# Altium PCB SMU_V2.01.PcbDoc (part 2 of 2)
Units mil, origin at the board's own origin, x right, y up, seen from the top; angles counter-clockwise.
Board outline 8661.42 x 7437.01 mil, 4 copper layers (Component Side, Ground Plane, Power Plane, Solder Side), stack 33.234 mil thick; 219 components, 151 nets, 743 pads, 760 vias.
Unrouted connection lines stored in the file: 6.
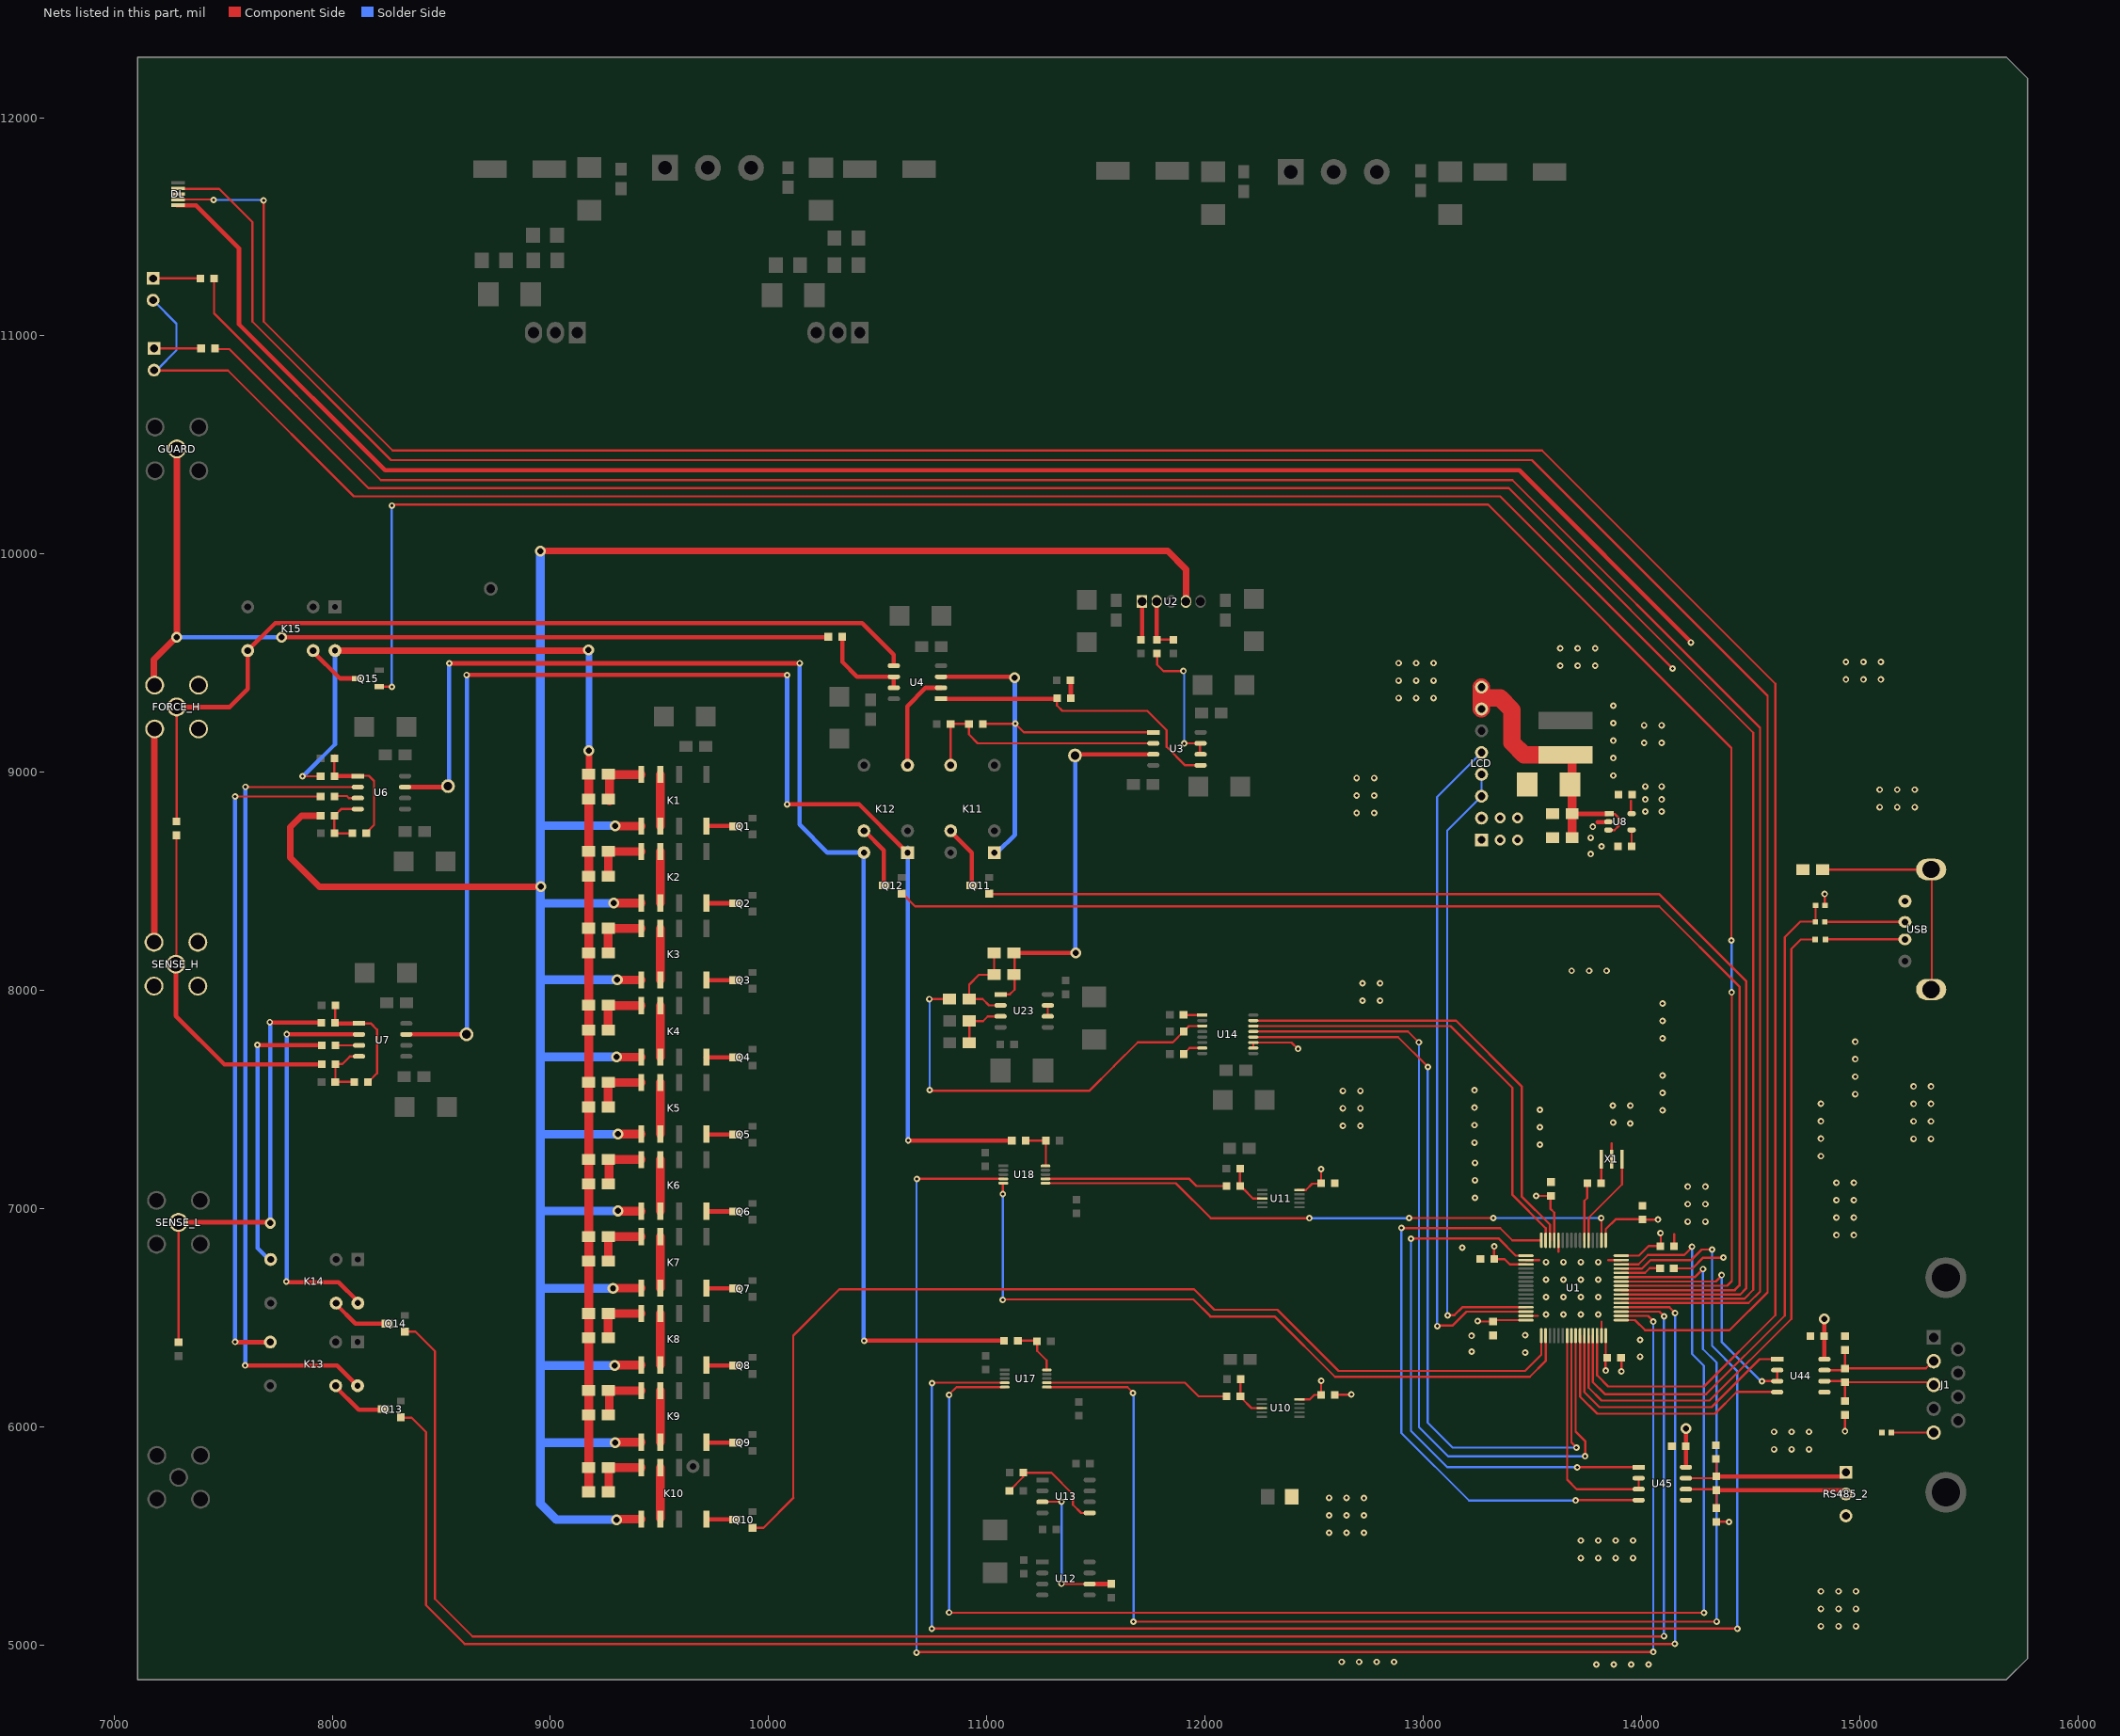
[diagram p4: the nets of this part, all layers, seen from the top]

## Via types
v1: diameter 30/30 (per signal layer), hole 14, Component Side to Solder Side, 647 vias
v2: diameter 50, hole 28, Component Side to Solder Side, 66 vias
v3: diameter 30, hole 14, Component Side to Solder Side, 43 vias
v4: diameter 39.37, hole 29.53, Component Side to Solder Side, 2 vias
v5: diameter 66.93, hole 47.24, Component Side to Solder Side, 2 vias

## Nets (pads, with @x,y where several pads share a name; then routed paths per layer and width w, separated by ;. In a path a pad name is that pad's centre, name@x,y a point inside that pad or via, vN(x,y) a via of type N, cw(c..) or ccw(c..) an arc to the next point about the centre after c; other vN are vias at no path point) (continued)
CTRL10: Q10.1 U1.33 | length 4798.6
  Component Side w10: Q10.1@9920.57,5537.65 9976.4,5537.65 10113.13,5674.38 ; Q10.1@9922.12,5537.11 Q10.1@9922.12,5551.99 ; 10112.55,5673.29 10112.55,6418.58 10324.16,6630.2 11949.24,6630.2 12042.84,6536.6 12331.73,6536.6 12612.01,6256.32 13466.42,6256.32 13540.97,6330.87 U1.33@13540.97,6418.24
CTRL11: Q11.1 U1.55 | length 5625.4
  Component Side w10: Q11.1@11014.47,8436.12 11020.61,8442.25 14080.45,8442.25 14478.93,8043.78 14478.93,8042.97 14479.29,8042.61 14479.29,6633.68 14452.82,6607.22 U1.55@13907.11,6607.22
CTRL12: Q12.1 U1.56 | length 5930.3
  Component Side w10: Q12.1@10614.72,8442.38 10671.36,8385.73 14080.95,8385.74 14449,8017.69 14449,6648.43 14427.48,6626.9 U1.56@13907.11,6626.9
CTRL13: Q13.1 U1.52 | length 8504
  Component Side w10: Q13.1@8316.05,6042.29 8363.72,6042.29 8429.56,5976.45 8429.56,5182.38 8606.5,5005.45 v3@14152.06,5005.45 ; U1.52@13907.11,6548.16 14128.51,6548.16 v3@14154.38,6522.29
  Solder Side w10: v3@14154.38,5005.85 v3@14154.38,6521.19
  other v3: 14152.57,5005.85 14154.13,6521.21
CTRL14: Q14.1 U1.51 | length 8689.2
  Component Side w10: Q14.1@8326.42,6436.35 8381.6,6436.35 8470.69,6347.26 8470.69,5212.23 8643.37,5039.55 v3@14103.85,5039.55 ; U1.51@13907.11,6528.48 14082.3,6528.48 v3@14101.1,6509.67
  Solder Side w10: v3@14103.13,5039.82 v3(14103.13,6506.32)
  other v3: 14102.67,5041.07
CTRL15: Q15.1 U1.57 | length 10461.4
  Component Side w10: Q15.1@8214.96,9392.83 v3@8277.84,9392.83 ; v3@8272.01,10226.66 13297.33,10226.66 14412.19,9111.8 v1@14412.19,8228.18 ; U1.57@13907.11,6646.59 14392.55,6646.59 14413.69,6667.73 v1@14413.69,7988.82
  Solder Side w10: v3(8272.93,9391.66) v3@8272.93,10227.29 ; v1(14413.05,7991.51) v1@14413.05,8232.41
  other v1: 14412.19,8229.76
  other v3: 8273.17,10222.14
D1: K1.8 Q1.3 | length 133.6
  Component Side w20: K1.8@9715.55,8753.74 Q1.3@9849.19,8753.74
D2: K2.8 Q2.3 | length 130.3
  Component Side w20: K2.8@9715.03,8399.71 Q2.3@9845.34,8399.71
D3: K3.8 Q3.3 | length 130.4
  Component Side w20: K3.8@9714.93,8046.63 Q3.3@9845.34,8046.63
D3V3: C1.2 C2.2 C3.2 C4.2 C5.2 C6.2 C22.2 C29.2 C81.2 C85.2 C108.2 LED0.2 LED1.2 R42.1 R102.2 R105.2 U1.1 U1.13 U1.19 U1.32 U1.48 U1.64 U8.5 U10.10 U11.10 U14.10 U14.11 U44.8 U45.8 | length 10578.4
  Component Side w10: LED1.2@7182.43,10841.68 7522.4,10841.68 8099.34,10264.74 13352.45,10264.74 v1(14141.88,9475.31) ; U14.10@12221.05,7736.31 U14.11@12221.05,7758.94 ; U14.11@12226.3,7761.51 12395.95,7761.51 12424.84,7732.62 v1@12426.19,7732.62 ; U11.10@12421.52,7085.54 12461.73,7085.54 12490.94,7114.75 C85.2@12523.99,7114.75 ; U10.10@12432.09,6125.59 12479.89,6125.59 12500.92,6146.61 C81.2@12515.07,6146.61 ; C85.2@12531.5,7116.98 v1@12531.5,7175.83 ; C81.2@12531.71,6147.25 v1@12531.71,6210.47 ; v1@13245.25,6482.49 C6.2@13319.59,6482.49 ; C2.2@13312.76,6768.97 13372.99,6768.97 13396.94,6745.01 U1.19@13470.11,6745.01 ; C6.2@13319.59,6489.11 U1.32@13470.11,6489.11 ; C2.2@13324.77,6770.14 v1@13324.77,6828.08 ; v1(13516.67,7058.4) C1.2@13582.31,7058.4 ; C1.2@13584.91,7058.4 C1.2@13582.31,7058.4 ; U1.13@13600.03,6855.25 13600.03,6982.34 13582.31,7000.06 C1.2@13582.31,7058.4 ; v1(13835.74,6258.05) C5.2@13835.74,6314.15 ; C5.2@13836.25,6305.29 U1.48@13836.25,6418.24 ; U1.1@13836.25,6855.25 13836.25,6906.38 13881.15,6951.29 C4.2@14009.16,6951.29 ; U1.64@13907.11,6784.38 13987.94,6784.38 14032.89,6829.34 C3.2@14084.69,6829.34 ; U8.5@13950.9,8809.48 13950.9,8869.84 ; C4.2@14003.81,6950.29 v1@14078.83,6950.29 ; C3.2@14088.76,6836.88 v1@14088.76,6883.52 ; R105.2@14342.63,5565.07 v1@14398.65,5565.07 ; v2(14838.42,6495.31) v2@14838.42,6508.77 ; R42.1@14839.75,8391.23 v1(14839.75,8442.22) ; v1(14932.63,5979.56) R102.2@14932.63,6055.07
  Component Side w20: U45.8@14203.42,5815.31 v2(14203.42,5991.84) ; U44.8@14838.42,6310.31 v2(14838.42,6495.31)
  Solder Side w10: LED0.2@7178.74,11163.53 7285.73,11056.54 7285.63,11056.44 7285.63,10933.88 7194.78,10843.04 LED1.2@7183.34,10843.04
  other v1: 14401.39,5564.22 12532.32,6210.98 13248.99,6485.31 13325.59,6826.87 14087.17,6887.98 14075.08,6949.95 12531.7,7180.98 12426.15,7732.55 14016.88,8820.31 14091.88,8820.31 14016.88,8875.31 14091.88,8875.31 14016.88,8935.31 14091.88,8935.31
D4: K4.8 Q4.3 | length 133.8
  Component Side w20: K4.8@9711.55,7693.54 Q4.3@9845.34,7693.54
D5: K5.8 Q5.3 | length 132.6
  Component Side w20: K5.8@9712.77,7340.46 Q5.3@9845.34,7340.46
D5V0: C57.2 C58.2 C59.1 L2.2 LCD.7 LCD.8 U8.1 U8.3 | length 1367.8
  Component Side w10: U8.3@13844.6,8734.68 13876.25,8734.68 13896.88,8755.31 13896.88,8790.31 13877.71,8809.48 U8.1@13844.6,8809.48
  Component Side w22: C58.2@13682.71,8809.48 U8.1@13844.6,8809.48
  Component Side w40: C57.2@13682.34,8700.76 13682.34,8935.31 L2.2@13682.34,9070.07
  Component Side w80: LCD.7@13266.88,9290.31 LCD.8@13266.88,9390.31 ; 13266.88,9340.31 13351.88,9340.31 13406.88,9285.31 13406.88,9135.31 13461.88,9080.31 L2.2@13651.88,9080.31
D6: K6.8 Q6.3 | length 126.8
  Component Side w20: K6.8@9718.57,6987.37 Q6.3@9845.34,6987.37
D7: K7.8 Q7.3 | length 128.9
  Component Side w20: K7.8@9716.44,6634.29 Q7.3@9845.34,6634.29
D8: K8.8 Q8.3 | length 127
  Component Side w20: K8.8@9718.38,6281.21 Q8.3@9845.34,6281.21
D9: K9.8 Q9.3 | length 132
  Component Side w20: K9.8@9713.35,5928.12 Q9.3@9845.34,5928.12
D10: K10.8 Q10.3 | length 128
  Component Side w20: K10.8@9715.55,5576.99 Q10.3@9843.53,5576.99
D11: K11.5 Q11.3 | length 272.2
  Component Side w10: K11.5@10834.46,8728.35 K11.5@10834.46,8732.05
  Component Side w20: K11.5@10834.46,8728.35 10930.62,8632.19 Q11.3@10930.62,8499.67
D12: K12.5 Q12.3 | length 284.1
  Component Side w10: K12.5@10436.55,8732.05 K12.5@10438.01,8732.05
  Component Side w20: K12.5@10438.01,8732.05 10528.04,8642.01 Q12.3@10528.04,8486.75
D13: K13.5 Q13.3 | length 267.4
  Component Side w10: K13.5@8014.82,6185.08 K13.5@8014.82,6187.86
  Component Side w20: K13.5@8014.82,6185.08 8120.68,6079.23 Q13.3@8235.57,6079.23
D14: K14.5 Q14.3 | length 284.6
  Component Side w20: K14.5@8016.68,6562.69 8106.59,6472.77 Q14.3@8264.05,6472.77
D15: K15.5 Q15.3 | length 253.5
  Component Side w20: K15.5@7910.7,9554.75 8035.22,9430.23 Q15.3@8112.6,9430.23
DAC1_FSYNC: U1.41 U14.13 | length 3927.6
  Component Side w10: U14.13@12222.43,7811.9 12929.54,7811.9 v1@12979.23,7762.21 ; U1.41@13698.45,6418.24 13698.45,5978.74 13741.88,5935.31 v1(13741.88,5865.31)
  Solder Side w10: v1@12980.14,7761.37 12980.14,5999.26 13114.08,5865.31 v1(13741.88,5865.31)
  other v1: 12979.57,7762.59
DAC1_RESET: U1.14 U14.15 | length 2110.4
  Component Side w10: U14.15@12224.6,7862.29 13149.46,7862.29 13450.72,7561.03 13450.72,7056.85 13580.34,6927.22 U1.14@13580.34,6855.25
DAC1_SCLK: U1.40 U14.12 | length 3735.5
  Component Side w10: U14.12@12224.06,7786.7 12884.54,7786.7 v1@13020.01,7651.24 ; U1.40@13678.77,6418.24 13678.77,5928.43 v1(13701.88,5905.31)
  Solder Side w10: v1@13020.04,7651.46 13020.04,6019.85 13134.58,5905.31 v1(13701.88,5905.31)
  other v1: 13020.67,7649.88
DAC1_SDATA: U1.15 U14.14 | length 2059.5
  Component Side w10: U14.14@12225.14,7837.1 13125.18,7837.1 ; 13127.08,7835.11 13408.8,7553.4 13408.8,7062.49 13560.66,6910.63 U1.15@13560.66,6855.25
DGND: C1.1 C2.1 C3.1 C4.1 C5.1 C6.1 C22.1 C23.1 C29.1 C57.1 C58.1 C59.2 C81.1 C85.1 C108.1 DL.5 L1.2 L3.2 LCD.1 LCD.2 R2.2 R66.1 R101.2 R104.2 RS485_2.3 U1.12 U1.18 U1.31 U1.47 U1.63 U8.2 U44.5 U45.5 USB.4 X1.2 | length 8807.1
  Component Side w10: C81.1@12594.7,6147.25 v1@12672.07,6147.25 ; U1.31@13470.11,6508.79 13525.37,6508.79 ; U1.18@13470.11,6764.7 13531.27,6764.7 ; 13619.71,6802.48 U1.12@13619.71,6855.25 ; U1.47@13816.56,6418.24 13816.56,6481.79 ; 13847.49,6764.7 U1.63@13907.11,6764.7 ; X1.2@13863.21,7227.14 13863.21,7299.16 ; v1(13907.96,6253.87) C5.1@13907.96,6317.13 ; C3.1@14149.66,6828.63 14149.66,6882.15 ; 14166.08,6726.9 14233.71,6726.9 14282.33,6775.51 v1@14373.8,6775.51 ; v1(14226.55,9594.76) v1@14226.55,9597.59
  Component Side w20: DL.5@7287.73,11598.8 7376.27,11598.8 7572.49,11402.58 7572.49,11053.99 8242.44,10384.03 13440.1,10384.03 v1@14226.55,9597.59 ; 13798.66,8772.08 U8.2@13844.6,8772.08
  other v1: 13792.56,4911.52 13872.56,4911.52 13952.56,4911.52 14032.56,4911.52 12625.86,4923 12705.86,4923 12785.86,4923 12865.86,4923 14822.53,5086.38 14902.53,5086.38 14982.53,5086.38 14822.53,5166.38 14902.53,5166.38 14982.53,5166.38 14822.53,5246.38 14902.53,5246.38 14982.53,5246.38 13721.63,5399.14 13801.63,5399.14 13881.63,5399.14 13961.63,5399.14 13721.63,5479.14 13801.63,5479.14 13881.63,5479.14 13961.63,5479.14 12568.37,5515.09 12648.37,5515.09 12728.37,5515.09 12568.37,5595.09 12648.37,5595.09 12728.37,5595.09 12728.25,5673.54 12568.37,5675.09 12648.37,5675.09 14607.34,5897.3 14687.34,5897.3 14767.34,5897.3 14607.34,5977.3 14687.34,5977.3 14767.34,5977.3 12670.6,6148.64 13993.99,6322.01 13466.88,6340.31 13221.75,6344.34 13993.99,6398.36 13220.96,6417.42 13466.88,6420.31 13561.88,6515.31 13641.88,6515.31 13721.88,6515.31 13801.88,6515.31 13561.88,6595.31 13641.88,6595.31 13721.88,6595.31 13801.88,6595.31 13561.88,6675.31 13641.88,6675.31 13721.88,6675.31 13801.88,6675.31 13561.88,6755.31 13641.88,6755.31 13721.88,6755.31 13801.88,6755.31 14374.93,6776.65 13178.69,6821.71 14893.33,6879.01 14973.33,6879.01 14212.33,6940.74 14292.33,6940.74 14893.33,6959.01 14973.33,6959.01 14212.33,7020.74 14292.33,7020.74 14893.33,7039.01 14973.33,7039.01 13236.88,7050.31 14212.33,7100.74 14292.33,7100.74 14893.33,7119.01 14973.33,7119.01 13236.88,7130.31 13236.88,7210.31 14822.19,7240.68 13534.13,7293.67 13234.52,7303.01 15246.88,7320.31 15326.88,7320.31 14822.19,7320.68 13534.13,7373.67 12631.88,7380.31 12711.88,7380.31 13234.52,7383.01 13948.13,7390.96 13869.84,7395.33 15246.88,7400.31 15326.88,7400.31 14822.19,7400.68 14096.2,7450.86 13534.13,7453.67 12631.88,7460.31 12711.88,7460.31 13234.52,7463.01 13868.91,7472.63 13948.91,7472.63 15246.88,7480.31 15326.88,7480.31 14822.19,7480.68 14979.77,7525.18 14096.2,7530.86 12631.88,7540.31 12711.88,7540.31 13234.52,7543.01 15246.88,7560.31 15326.88,7560.31 14979.77,7605.18 14096.2,7610.86 14979.77,7685.18 14979.77,7765.18 14096.2,7780.86 14096.2,7860.86 14096.2,7940.86 12721.88,7953.43 12801.88,7953.43 12721.88,8033.43 12801.88,8033.43 13679.84,8090.23 13759.84,8090.23 13839.84,8090.23 13766.88,8625.31 13816.88,8660.31 13766.88,8700.31 13776.88,8750.31 12694.62,8813.79 12774.62,8813.79 15091.88,8840.31 15171.88,8840.31 15251.88,8840.31 12694.62,8893.79 12774.62,8893.79 15091.88,8920.31 15171.88,8920.31 15251.88,8920.31 12694.62,8973.79 12774.62,8973.79 13870.46,8985.13 13870.46,9065.13 14011.88,9135.31 14091.88,9135.31 13870.46,9145.13 14011.88,9215.31 14091.88,9215.31 13870.46,9225.13 13870.46,9305.13 12886.88,9340.31 12966.88,9340.31 13046.88,9340.31 12886.88,9420.31 12966.88,9420.31 13046.88,9420.31 14936.88,9425.31 15016.88,9425.31 15096.88,9425.31 13627.78,9488.72 13707.78,9488.72 13787.78,9488.72 12886.88,9500.31 12966.88,9500.31 13046.88,9500.31 14936.88,9505.31 15016.88,9505.31 15096.88,9505.31 13627.78,9568.72 13707.78,9568.72 13787.78,9568.72
  other v2: 13351.88,8690.31 13431.88,8690.31 13351.88,8790.31 13431.88,8790.31
DUT_VOLTAGE: K12.1 R51.2 T2.1 U7.7 | length 6406.4
  Component Side w20: U7.7@8339.58,7798.88 T2.1@8615.03,7798.88 ; v3(8615.67,9446.19) v3@10079.09,9446.19 ; v3(10084.09,8853.31) 10414.46,8853.31 K12.1@10611.71,8656.06 ; v3@10638.09,7311.69 R51.2@11114.15,7311.69
  Solder Side w20: T2.1@8616.66,7799.23 v3@8616.66,9446.22 ; v3@10084.41,8856.18 v3(10084.41,9445.92) ; v3@10637.68,7308.76 K12.1@10637.68,8654.16
  other v3: 10639.81,7313.24
FB_R_T1: C70.1 C71.1 C72.1 C73.1 C74.1 C75.1 C76.1 C77.1 C78.1 C79.1 K15.6 R19.2 R31.1 R32.1 R33.1 R34.1 R35.1 R36.1 R37.1 R38.1 R39.1 R40.1 | length 5739.7
  Component Side w10: v3@7867.94,8981.55 R19.2@7948.53,8981.55
  Component Side w30: K15.6@8012.65,9557.88 v2@9173.85,9557.88 ; R31.1@9171.24,8985.77 9176.58,8991.11 v2(9176.56,9099.22)
  Component Side w40: C79.1@9175.42,5705.38 R40.1@9175.42,5813.12 C78.1@9175.42,6055.22 R39.1@9175.42,6166.28 C77.1@9175.42,6407.94 R38.1@9175.42,6519.44 C76.1@9175.42,6760.67 R37.1@9175.42,6872.6 C75.1@9175.42,7113.4 R36.1@9175.42,7225.76 C74.1@9175.42,7466.13 R35.1@9175.42,7578.92 C73.1@9175.42,7818.86 R34.1@9175.42,7932.09 C72.1@9175.42,8171.58 R33.1@9175.42,8285.25 C71.1@9175.42,8524.31 R32.1@9175.42,8638.41 C70.1@9175.42,8877.04 R31.1@9175.42,8991.57
  Solder Side w20: v3@7866.28,8982.22 8012.65,9128.59 K15.6@8012.65,9557.88
  Solder Side w30: v2@9175.92,9558.76 9176.56,9558.12 v2(9176.56,9099.22)
  other v2: 9174.48,9560.15
  other v3: 7864.07,8981.28
FB_R_T2: K1.5 K2.5 K3.5 K4.5 K5.5 K6.5 K7.5 K8.5 K9.5 K10.5 R21.2 U2.4 | length 13617.1
  Component Side w30: R21.2@7939.8,8801.07 7860.21,8801.07 7808.19,8749.06 7808.19,8607.99 7941.02,8475.16 v2@8953.23,8475.16 ; v2@8955.66,10013.74 11828.42,10013.74 11911.99,9930.18 U2.4@11911.99,9782.7
  Component Side w40: v2@9287.6,6635.91 K7.5@9416.34,6635.91 ; v2@9288.99,8400.76 K2.5@9416.34,8400.76 ; v2@9289.28,6282.93 K8.5@9416.34,6282.93 ; v2@9296.82,5929.96 K9.5@9416.34,5929.96 ; v2@9297.25,7694.82 K4.5@9416.34,7694.82 ; v2@9298.95,8753.74 K1.5@9416.34,8753.74 ; v2@9304.27,5576.99 K10.5@9416.34,5576.99 ; v2@9307.92,8047.79 K3.5@9416.34,8047.79 ; v2@9309.83,6988.88 K6.5@9416.34,6988.88 ; v2@9314.01,7341.85 K5.5@9416.34,7341.85
  Solder Side w40: v2@8953.9,10014.45 8953.9,6989.61 ; 8954.79,8755.61 v2@9300.6,8755.61 ; 8956.15,6281.23 v2(9293.52,6281.23) ; 8957.46,6634.94 v2(9286.79,6634.94) ; 8960.46,7695.1 v2(9303.13,7695.1) ; 8960.49,8399.92 v2(9289.6,8399.92) ; 8962.72,8049.77 v2(9306.02,8049.77) ; 8963.99,7341.39 v2(9308.9,7341.39) ; v2(9296.41,5927.52) 8953.9,5927.52 ; v2(9303.13,5574.77) 9027.3,5574.77 8953.9,5648.16 8953.9,5927.52 ; v2(9308.9,6989.61) 8953.9,6989.61 ; 8953.9,5927.52 8953.9,6989.61
  other v2: 8956.65,8475.63 9296.1,8754.49 8953.63,10013.91
FH_OUT: FORCE_H.1 K15.4 R76.1 U4.5 | length 4177.8
  Component Side w10: R76.1@7286.86,8778.52 FORCE_H.1@7286.86,9298.99 ; K15.4@7612.65,9557.88 K15.4@7612.9,9558.12
  Component Side w20: FORCE_H.1@7286.86,9298.99 7530.07,9298.99 7612.9,9381.82 7612.9,9558.12 7738.67,9683.9 10427.91,9683.9 10572.74,9539.06 U4.5@10572.74,9490.63
GUARD: FORCE_H.2 GUARD.1 R28.2 SENSE_H.2 | length 5137.4
  Component Side w10: SENSE_H.2@7175.5,8220.98 SENSE_H.2@7184.03,8220.98 ; SENSE_H.2@7383.96,8011.56 SENSE_H.2@7383.96,8020.19
  Component Side w20: v2@7762.69,9619.66 R28.2@10273.67,9619.66
  Component Side w30: FORCE_H.2@7177.03,9209.76 7184.03,9202.76 SENSE_H.2@7184.03,8220.98 ; FORCE_H.2@7182.05,9394.91 7182.05,9516.65 7288.07,9622.67 GUARD.1@7288.07,10482.17
  Solder Side w20: v2@7282.04,9619.6 v2(7768.41,9619.6)
  other v2: 7287.71,9619.68
LED0: R68.2 U1.53 | length 11274.3
  Component Side w10: R68.2@7458.38,11264.15 7458.38,11102.96 8222.49,10338.85 13408.34,10338.85 14543.28,9203.91 14543.28,6620.21 14490.92,6567.85 U1.53@13907.11,6567.85
LED1: R69.2 U1.54 | length 10957.2
  Component Side w10: R69.2@7459.04,10939.76 7528.35,10939.76 8165.67,10302.45 13391.54,10302.45 14512.4,9181.58 14512.4,6628.06 14471.87,6587.53 U1.54@13907.11,6587.53
NetC20_2: C20.2 R10.2 U2.2 | length 254.1
  Component Side w10: R10.2@11779.77,9607.52 C20.2@11855.36,9607.52
  Component Side w20: R10.2@11777.83,9608.74 U2.2@11777.83,9787.27
NetC21_1: C21.1 R16.2 | length 86.5
  Component Side w20: R16.2@11384.47,9333.72 C21.1@11384.47,9420.26
NetC23_2: C23.2 U8.4 | length 72.4
  Component Side w10: C23.2@13954.72,8663.27 U8.4@13954.72,8735.63
NetC30_1: C30.1 C31.2 R19.1 U6.1 | length 516.8
  Component Side w10: C31.2@8008.6,9074.08 C31.2@8011.71,9077.19 ; R19.1@8009.95,8982.56 C31.2@8009.95,9064.12 ; U6.1@8125.98,8984.01 8167.34,8984.01 8191.55,8959.8 8191.55,8758.68 C30.1@8165.54,8732.67
  Component Side w20: R19.1@8009.13,8982.4 U6.1@8126.51,8982.4
NetC30_2: C30.2 C32.1 R21.1 U6.4 | length 259.9
  Component Side w10: C32.1@8009.83,8726.33 R21.1@8009.83,8801.5 ; C32.1@8010.35,8719.3 C30.2@8086.3,8719.3 ; R21.1@8017.78,8808.57 8040.53,8831.32 U6.4@8117.1,8831.32
NetC33_2: C33.2 C34.1 R12.2 U7.1 | length 540.5
  Component Side w10: R12.2@8013.26,7852.35 C33.2@8013.26,7934.4 ; U7.1@8123.04,7849.28 8176.02,7849.28 8204.98,7820.32 8204.98,7619.79 C34.1@8166.55,7581.36
  Component Side w20: R12.2@8004.77,7848.98 U7.1@8114.44,7848.98
NetC34_2: C34.2 C35.1 R14.2 U7.4 | length 294.3
  Component Side w10: C34.2@8103.05,7581.03 8014.33,7581.03 R14.2@8014.33,7662.74 8045.95,7662.74 8080.5,7697.29 U7.4@8123.86,7697.29
NetC49_1: C49.1 U14.1 | length 87.2
  Component Side w10: C49.1@11899.97,7887.49 U14.1@11987.2,7887.49
NetC70_2: C70.2 K1.4 R31.2 | length 267.6
  Component Side w40: C70.2@9270.78,8867.93 9270.78,8989.96 K1.4@9416.34,8989.96
NetC71_2: C71.2 K2.4 R32.2 | length 252.5
  Component Side w40: C71.2@9265.42,8526.63 R32.2@9265.42,8638.41 ; R32.2@9275.65,8636.98 K2.4@9416.34,8636.98
NetC72_2: C72.2 K3.4 R33.2 | length 255.1
  Component Side w10: C72.2@9263.99,8196.39 C72.2@9274.69,8185.68
  Component Side w40: C72.2@9263.99,8196.39 9263.99,8284.01 K3.4@9416.34,8284.01
NetC73_2: C73.2 K4.4 R34.2 | length 262.3
  Component Side w10: C73.2@9264.32,7822.44 C73.2@9265.53,7821.24
  Component Side w40: C73.2@9264.32,7822.44 9264.32,7931.04 K4.4@9416.34,7931.04
NetC74_2: C74.2 K5.4 R35.2 | length 262.6
  Component Side w40: C74.2@9263.58,7468.25 9263.58,7578.07 K5.4@9416.34,7578.07
NetC75_2: C75.2 K6.4 R36.2 | length 264.2
  Component Side w10: R36.2@9268.3,7224.97 R36.2@9268.43,7225.1
  Component Side w40: C75.2@9268.3,7108.84 R36.2@9268.3,7224.97 ; R36.2@9268.43,7225.1 K6.4@9416.34,7225.1
NetC76_2: C76.2 K7.4 R37.2 | length 260.5
  Component Side w40: C76.2@9265.3,6762.64 9265.3,6872.13 K7.4@9416.34,6872.13
NetC77_2: C77.2 K8.4 R38.2 | length 260
  Component Side w40: C77.2@9264.02,6411.52 9264.02,6519.15 K8.4@9416.34,6519.15
NetC78_2: C78.2 K9.4 R39.2 | length 253.3
  Component Side w40: C78.2@9269.23,6060.03 9269.23,6166.18 K9.4@9416.34,6166.18
NetC79_2: C79.2 K10.4 R40.2 | length 257.4
  Component Side w40: C79.2@9267.22,5704.95 9267.22,5813.21 K10.4@9416.34,5813.21
NetC80_1: C80.1 R30.2 U10.3 | length 195.8
  Component Side w10: R30.2@12162.1,6140.26 C80.1@12162.1,6222.68 ; R30.2@12166.49,6132.16 12212.44,6086.22 U10.3@12260.83,6086.22
NetC84_2: C84.2 R29.2 U11.3 | length 179.5
  Component Side w10: R29.2@12160.35,7102.94 C84.2@12160.35,7183.14 ; R29.2@12171.14,7094.85 12219.83,7046.17 U11.3@12250.26,7046.17
NetC90_2: C90.2 U12.6 U13.3 | length 672.7
  Component Side w10: U13.3@11249.53,5657.3 v1@11335.08,5657.3 ; 11360.47,5280.02 U12.6@11470.55,5280.02
  Component Side w20: U12.6@11470.55,5280.02 C90.2@11570.77,5280.02
  Solder Side w10: v1(11342.2,5280.94) v1@11342.2,5657.74
  other v1: 11342.55,5657.21
NetC154_1: C154.1 R24.2 R25.1 U23.2 | length 452.6
  Component Side w10: R24.2@10918.59,7960.58 10918.59,8026.92 10963.38,8071.71 11032.55,8071.71 11033.61,8072.78 R25.1@11033.61,8172.08 ; R24.2@10921.81,7960.94 10980.3,7960.94 11009.32,7931.92 U23.2@11062.71,7931.92
NetJ1_2: J1.2 R100.1 R101.1 U44.7 | length 598
  Component Side w10: U44.7@14838.42,6259.91 R100.1@14929.48,6259.91 ; R101.1@14932.63,6352.55 R100.1@14932.63,6268.06 15303.67,6268.06 J1.2@15340.01,6304.4
NetJ1_3: J1.3 R100.2 R102.1 U44.6 | length 577.3
  Component Side w10: U44.6@14838.42,6209.52 R100.2@14933.18,6209.52 ; R102.1@14932.63,6118.06 R100.2@14932.63,6205.07 ; R100.2@14933.18,6205.07 J1.3@15328.72,6205.07
NetJ1_5: J1.5 R66.2 | length 190.3
  Component Side w10: R66.2@15148.68,5974.15 J1.5@15338.96,5974.15
NetK1_3: K1.3 K1.6 | length 239.2
  Component Side w10: K1.3@9502.95,8989.96 K1.3@9502.95,8992.97
  Component Side w40: K1.6@9502.95,8753.74 K1.3@9502.95,8989.96
NetK2_3: K2.3 K2.6 | length 236.2
  Component Side w40: K2.6@9502.95,8400.76 K2.3@9502.95,8636.98
NetK3_3: K3.3 K3.6 | length 243.5
  Component Side w10: K3.6@9502.95,8040.53 K3.6@9502.95,8047.79
  Component Side w40: K3.6@9502.95,8047.79 K3.3@9502.95,8284.01
NetK4_3: K4.3 K4.6 | length 238.4
  Component Side w10: K4.6@9502.95,7692.6 K4.6@9502.95,7694.82
  Component Side w40: K4.6@9502.95,7694.82 K4.3@9502.95,7931.04
NetK5_3: K5.3 K5.6 | length 238.2
  Component Side w10: K5.6@9502.95,7339.91 K5.6@9502.95,7341.85
  Component Side w40: K5.6@9502.95,7341.85 K5.3@9502.95,7578.07
NetK6_3: K6.3 K6.6 | length 238.7
  Component Side w10: K6.6@9502.95,6986.41 K6.6@9502.95,6988.88
  Component Side w40: K6.6@9502.95,6988.88 K6.3@9502.95,7225.1
NetK7_3: K7.3 K7.6 | length 243.2
  Component Side w10: K7.6@9502.95,6628.95 K7.6@9502.95,6635.91
  Component Side w40: K7.6@9502.95,6635.91 K7.3@9502.95,6872.13
NetK8_3: K8.3 K8.6 | length 237.3
  Component Side w10: K8.6@9502.95,6281.81 K8.6@9502.95,6282.93
  Component Side w40: K8.6@9502.95,6282.93 K8.3@9502.95,6519.15
NetK9_3: K9.3 K9.6 | length 240.2
  Component Side w10: K9.6@9502.95,5925.94 K9.6@9502.95,5929.96
  Component Side w40: K9.6@9502.95,5929.96 K9.3@9502.95,6166.18
NetK10_3: K10.3 K10.6 | length 232
  Component Side w40: K10.6@9502.95,5581.19 K10.3@9502.95,5813.21
NetK11_1: K11.1 R18.1 U3.1 U4.3 | length 1967.2
  Component Side w10: R18.1@10980.96,9221.85 v1@11124.29,9221.85 ; v1@11129.78,9222.57 11169.24,9183.11 U3.1@11762.79,9183.11
  Component Side w20: U4.3@10789.97,9437.78 v2@11129.97,9437.78
  Solder Side w20: K11.1@11050.16,8636.03 11128.37,8714.24 v2@11128.37,9438.15
  other v1: 11129.92,9223.33
  other v2: 11126.63,9432.66
NetK11_4: K11.4 R17.1 R18.2 U3.2 | length 1169.7
  Component Side w10: K11.4@10833.6,9041.19 R17.1@10833.6,9216.34 ; R17.1@10833.6,9221.7 R18.2@10921.57,9221.7 ; R18.2@10917.57,9217.89 10917.57,9173.36 10958.21,9132.71 U3.2@11762.79,9132.71
NetK12_3: K12.3 U4.2 | length 463.6
  Component Side w20: K12.3@10634.78,9029.12 10634.78,9302.37 10719.8,9387.39 U4.2@10789.97,9387.39
NetK13_3: K13.3 R44.1 | length 3057.3
  Component Side w10: v3@7556.04,8889.46 R44.1@7949.27,8889.46
  Component Side w20: v3@7551.15,6387.86 K13.3@7714.82,6387.86
  Solder Side w20: v3(7554.75,8888.66) 7554.75,6389.81 v3@7555.85,6388.71
  other v3: 7554.86,6389.41
NetK14_3: K14.3 R45.1 | length 1298.9
  Component Side w20: v3@7662.43,7749.31 R45.1@7951.61,7749.31
  Solder Side w20: v3@7657.53,7747.78 7657.53,6819.38 K14.3@7715,6761.91
  other v3: 7656.67,7750.58
NetL1_1: L1.1 USB.5 USB.6 | length 1034.6
  Component Side w10: L1.1@14834.53,8554.39 USB.5@15319.17,8554.39 ; USB.6@15330.03,8004.39 USB.5@15330.03,8554.39
NetLED0_1: LED0.1 R68.1 | length 213.9
  Component Side w10: LED0.1@7178.74,11263.53 R68.1@7392.6,11263.53
NetLED1_1: LED1.1 R69.1 | length 216.5
  Component Side w10: LED1.1@7183.34,10943.04 R69.1@7399.85,10943.04
NetR1_1: R1.1 X1.3 | length 109.9
  Component Side w10: R1.1@13815.97,7117.22 X1.3@13815.97,7227.14
NetR1_2: R1.2 U1.6 | length 268.4
  Component Side w10: U1.6@13737.82,6855.25 13737.82,7035.89 13751.21,7049.28 R1.2@13751.21,7118.08
NetR2_1: R2.1 U1.60 | length 185.9
  Component Side w10: U1.60@13907.11,6705.64 14016.33,6705.64 14037.95,6727.26 R2.1@14084.02,6727.26
NetR10_1: R10.1 U3.6 U3.7 | length 623.7
  Component Side w10: R10.1@11780.27,9541.92 11780.27,9493.19 11809.43,9464.03 v1(11900.76,9464.03) ; v1@11908.05,9132.64 11977.14,9132.64 U3.6@11977.14,9087.96
  Solder Side w10: v1(11904.35,9131.95) v1@11904.35,9460.63
NetR16_1: R16.1 U3.5 U4.1 | length 1375.2
  Component Side w10: R16.1@11321.28,9335.61 11321.28,9305.92 11345.54,9281.65 11734.63,9281.65 11824.12,9192.16 11824.12,9116.82 11909.02,9031.92 U3.5@11979.33,9031.92
  Component Side w20: U4.1@10789.97,9336.99 R16.1@11319.75,9336.99
NetR22_2: R22.2 R23.2 U23.3 | length 248.9
  Component Side w10: R23.2@10919.65,7762.56 R22.2@10919.65,7860.77 ; R22.2@10920.93,7859.95 10982.92,7859.95 11004.49,7881.52 U23.3@11062.71,7881.52
NetR27_2: R27.2 U2.1 | length 163.8
  Component Side w20: R27.2@11711.2,9618.9 U2.1@11711.2,9782.7
NetR28_1: R28.1 U4.6 U4.7 | length 410.6
  Component Side w20: R28.1@10337.44,9608.59 10337.44,9505.73 10405.39,9437.78 U4.6@10573.43,9437.78 U4.7@10573.43,9394.15
NetR29_1: R29.1 U18.7 | length 843.3
  Component Side w10: U18.7@11268.5,7136.7 11927.72,7136.7 11960.57,7103.85 R29.1@12098.16,7103.85
NetR30_1: R30.1 U17.7 | length 850.1
  Component Side w10: U17.7@11274.83,6202.19 11907.98,6202.19 11969.91,6140.26 ; 11970.05,6140.12 11969.91,6140.26 ; R30.1@12099.11,6140.26 11969.91,6140.26
NetR41_1: R41.1 USB.3 | length 368.9
  Component Side w10: R41.1@14839.88,8314.28 USB.3@15208.81,8314.28
NetR43_1: R43.1 USB.2 | length 362.1
  Component Side w10: R43.1@14844.26,8234.28 USB.2@15206.37,8234.28
NetR49_1: R49.1 R50.2 U17.10 | length 234.9
  Component Side w10: R49.1@11141.99,6395.15 R50.2@11224.89,6395.15 ; R50.2@11230.11,6392.86 11230.11,6348.31 11273.45,6304.96 U17.10@11273.45,6258.79
NetR51_1: R51.1 R52.2 U18.10 | length 205.3
  Component Side w10: R51.1@11177.14,7311.69 R52.2@11262.25,7311.69 ; U18.10@11270.14,7194.9 R52.2@11270.14,7315.09
NetR61_2: R61.2 R62.1 U13.5 | length 508.4
  Component Side w10: R61.2@11103.82,5707.87 11165.92,5769.96 R62.1@11165.92,5786.12 ; R62.1@11166.77,5790.37 11295.09,5790.37 11394.55,5690.91 11394.55,5643.1 11432.45,5605.19 U13.5@11466.46,5605.19
NetR103_1: R103.1 R104.1 RS485_2.1 U45.7 | length 790.1
  Component Side w10: U45.7@14203.42,5764.91 R103.1@14334.48,5764.91 ; R103.1@14342.63,5773.06 R104.1@14342.63,5851.06
  Component Side w20: R103.1@14342.63,5773.06 RS485_2.1@14923.63,5773.06
NetR103_2: R103.2 R105.1 RS485_2.2 U45.6 | length 811.4
  Component Side w10: U45.6@14203.42,5714.52 R103.2@14338.18,5714.52 ; R105.1@14342.63,5628.06 R103.2@14342.63,5710.07
  Component Side w20: R103.2@14342.63,5710.07 RS485_2.2@14937.29,5710.07
NetU1_5: U1.5 X1.1 | length 437.3
  Component Side w10: U1.5@13757.51,6855.25 13757.51,6958.5 13910.46,7111.45 X1.1@13910.46,7229.17
NetU23_6: U23.6 U23.7 | length 51.6
  Component Side w10: U23.6@11279.24,7880.35 U23.6@11279.24,7881.52 U23.7@11279.24,7931.92
NULL: C47.1 U14.7 | length 101.8
  Component Side w10: C47.1@11896.7,7709.05 11901.69,7709.05 11928.94,7736.31 U14.7@11987.2,7736.31
PGA1_A0: U1.61 U17.4 | length 7381.5
  Component Side w10: v3@10748.26,6202.19 U17.4@11081.92,6202.19 ; v3@10749.34,5075.41 v1(14439.11,5075.41) ; U1.61@13907.11,6725.33 14002.4,6725.33 14041.9,6764.83 14228.73,6764.83 14276.27,6812.37 v1@14314.83,6812.37
  Solder Side w10: v3(10747.57,5074.97) v3@10747.57,6202.8 ; v1(14323.25,6813.25) 14323.25,6371.55 14438.26,6256.53 v1@14438.26,5074.38
  other v3: 10748.33,6199.94
PGA1_A1: U1.62 U17.5 | length 6788.6
  Component Side w10: v3@10825.64,6147.46 10860.69,6182.51 U17.5@11081.92,6182.51 ; v3@10826.88,5148.53 v1(14286.3,5148.53) ; U1.62@13907.11,6745.01 13986.26,6745.01 14028.82,6787.57 14195.89,6787.57 v1@14233.69,6825.36
  Solder Side w10: v3(10826.94,5149.4) v3@10826.94,6148.83 ; v1(14231.66,6825.51) 14231.66,6334.2 14285.5,6280.36 v1@14285.5,5148.7
  other v3: 10826.82,6146.55
PGA1_WR: U1.59 U17.6 | length 6159.9
  Component Side w10: U17.6@11274.83,6182.51 11644.95,6182.51 v3@11671.84,6155.61 ; v3@11671.85,5107.37 14343.53,5107.37 v1(14344.33,5108.17) ; U1.59@13907.11,6685.96 14244.31,6685.96 v1@14280.82,6722.46
  Solder Side w10: v3(11671.92,5106.73) v3@11671.92,6155.61 ; v1(14281.8,6723.35) 14281.8,6357.11 14344.13,6294.77 v1@14344.13,5107.93
  other v3: 11669.54,6155.53
PGA2_A0: U1.50 U18.4 | length 7614.1
  Component Side w10: v3@10676.86,4968.38 v3(14054.43,4968.38) ; v3@10677.93,7136.7 U18.4@11075.59,7136.7 ; U1.50@13907.11,6508.79 14029.65,6508.79 v3@14051.66,6486.79
  Solder Side w10: v3(10677.82,4965.71) v3@10677.82,7137.68 ; v3@14053.62,4968.94 v3(14053.62,6482.21)
  other v3: 10678.88,7136.07
PGA2_A1: U1.34 U18.5 | length 3316.9
  Component Side w10: v3@11073.04,6583.84 11946.8,6583.84 12024.52,6506.12 12318.61,6506.12 12595.46,6229.27 13487.57,6229.27 13560.66,6302.36 U1.34@13560.66,6418.24 ; v3@11073.53,7066.98 U18.5@11073.53,7117.9
  Solder Side w10: v3(11072.97,6581.87) v3@11072.97,7067.24
  other v3: 11073.11,7066.92
PGA2_WR: U1.2 U18.6 | length 2719.1
  Component Side w10: U18.6@11268.5,7117.02 11865.83,7117.02 12026.81,6956.05 v3@12479.67,6956.05 ; v3(12934.67,6957.39) v3@13324.06,6957.39 ; U1.2@13816.56,6855.25 v3@13816.56,6956.54
  Solder Side w10: v3(12477.58,6956.66) v3@12931.63,6956.66 ; v3(13320.83,6957.2) v3@13817.37,6957.2
  other v3: 13815.49,6956.9
R_VOLTAGE: K12.6 R49.2 T1.1 U6.7 | length 6342.4
  Component Side w20: U6.7@8333.64,8932.11 T1.1@8534.73,8932.11 ; v3(8536.47,9499.16) v3@10138.1,9499.16 ; v3@10434.77,6395.15 R49.2@11079,6395.15
  Solder Side w20: T1.1@8535.82,8933.06 v3@8535.82,9498.18 ; v3(10141.8,9500.2) 10141.8,8760.21 10269.76,8632.25 K12.6@10439.07,8632.25 ; K12.6@10432.51,8632.18 10435.51,8629.18 10433.95,8627.62 10434.21,8627.36 v3@10434.21,6394.11
  other v3: 10437.23,6394.79
RG1+: K13.6 U6.2 | length 3725.4
  Component Side w10: v3@7602.82,8932.11 U6.2@8117.1,8932.11
  Component Side w20: v3@7596.22,6281.31 8021.37,6281.31 K13.6@8114.82,6187.86
  Solder Side w20: v3@7601.38,6279.82 7602.02,6280.46 v3(7602.02,8933.32)
  other v3: 7601.19,6281.59
RG1-: R44.2 U6.3 | length 111.3
  Component Side w10: R44.2@8009.69,8891.08 8067.04,8891.08 8076.4,8881.72 U6.3@8117.1,8881.72
RG2+: K14.6 U7.2 | length 1843.5
  Component Side w20: v3@7787.9,6662.95 8029.27,6662.95 8116.68,6575.54 K14.6@8116.68,6562.69 ; v3@7792.74,7798.88 U7.2@8123.04,7798.88
  Solder Side w20: v3@7791.8,6665.94 v3@7791.8,7801.25
  other v3: 7789.41,6665.98 7791.6,7799.68
RG2-: R45.2 U7.3 | length 112.8
  Component Side w10: R45.2@8010.19,7748.49 U7.3@8123.04,7748.49
RS485_RE: U1.58 U44.2 U44.3 | length 1154.9
  Component Side w10: U1.58@13907.11,6666.27 14341.06,6666.27 v3@14368.45,6693.66 ; v1(14551.88,6209.52) U44.3@14621.88,6209.52 ; U44.3@14621.88,6205.31 U44.3@14621.88,6209.52 ; U44.2@14621.88,6255.7 U44.3@14621.88,6209.52
  Solder Side w10: v3@14367.17,6695.79 14367.17,6390.02 v1@14547.67,6209.52 ; v1(14551.88,6209.52) v1@14551.88,6210.31
  other v3: 14367.59,6695.36
RS485_RE2: U1.39 U45.2 U45.3 | length 1056.4
  Component Side w10: U1.39@13659.08,6418.24 13659.08,5758.11 13702.67,5714.52 U45.3@13986.88,5714.52 U45.2@13986.88,5764.91
SENSE_H: R14.1 R76.2 SENSE_H.1 | length 1582.1
  Component Side w10: SENSE_H.1@7285.9,8111.41 R76.2@7285.9,8711.05
  Component Side w20: SENSE_H.1@7283.57,8111.41 7283.57,7883.49 7505.77,7661.29 R14.1@7946.08,7661.29
SENSE_L: R12.1 R75.1 SENSE_L.1 | length 2097.8
  Component Side w10: R75.1@7295.36,6388.03 SENSE_L.1@7295.36,6937.6
  Component Side w20: SENSE_L.1@7295.36,6937.6 v2@7709.54,6937.6 ; v3@7722.87,7852.88 R12.1@7943.27,7852.88
  Solder Side w20: v2(7715.75,6933.67) v3@7715.75,7847.31
  other v3: 7713.8,7855.09
SIGIN: C154.2 R25.2 T3.1 U3.3 U23.1 | length 1786.5
  Component Side w10: U23.1@11062.71,7982.31 11104.87,7982.31 11126.87,8004.31 11126.87,8172.08 R25.2@11123.61,8172.08
  Component Side w20: R25.2@11126.87,8172.08 v2@11404.28,8172.08 ; T3.1@11405.62,9082.32 U3.3@11762.79,9082.32
  Solder Side w20: v2@11405.15,8172.62 T3.1@11405.15,9080.27
  other v2: 11408.11,8171.77
SIGOUT: C48.1 R24.1 U14.3 | length 1862.5
  Component Side w10: v1@10737.06,7960.42 R24.1@10828.57,7960.42 ; v1@10741.06,7541.05 11470.53,7541.05 11582.09,7652.61 11582.09,7653.24 11691.73,7762.88 11852.24,7762.88 C48.1@11901.49,7812.12 ; C48.1@11909.65,7820.6 11926.15,7837.1 U14.3@11987.2,7837.1
  Solder Side w10: v1@10737.46,7957.73 10737.55,7957.64 v1(10737.55,7544.22)
  other v1: 10736.36,7960.72
SWCLK: DL.2 U1.49 | length 12021.3
  Component Side w10: DL.2@7292.31,11674.05 7482.03,11674.05 7634.23,11521.86 7634.23,11065.59 8268.96,10430.86 13497.6,10430.86 14577.6,9350.86 14577.6,6616.84 14403.33,6442.58 14016.89,6442.58 13970.36,6489.11 U1.49@13907.11,6489.11 ; DL.2@7302.76,11676.07 DL.2@7313.24,11676.07
SWDIO: DL.3 DL.4 U1.46 | length 12636.5
  Component Side w10: DL.4@7293.24,11624.89 DL.4@7313.24,11624.89 ; DL.3@7313.24,11650.48 DL.4@7313.24,11624.89 ; v3@7454.69,11624.89 DL.4@7313.24,11624.89 ; v3@7685.67,11623.61 7685.67,11065.54 8276.61,10474.6 13543.97,10474.6 14613.48,9405.09 14613.48,6511.9 14286.88,6185.31 13847.6,6185.31 13796.88,6236.03 U1.46@13796.88,6418.24
  Solder Side w10: v3(7456.39,11622.92) v3@7683.84,11622.92
  other v3: 7685.67,11621.37
UART3_RX: LCD.5 U1.30 | length 3147.3
  Component Side w10: v1@13063.94,6463.87 13132.9,6463.87 13197.5,6528.48 U1.30@13470.11,6528.48
  Solder Side w10: v1@13063.78,6460.29 13063.78,8886.65 13063.51,8886.93 LCD.5@13266.88,9090.31
  other v1: 13064.82,6462.05
UART3_TX: LCD.3 LCD.4 U1.29 | length 2919.2
  Component Side w10: v1@13113.3,6512.03 13142.34,6512.03 13178.47,6548.16 U1.29@13470.11,6548.16
  Solder Side w10: v1@13109.67,6511.3 13109.67,8732.9 LCD.3@13269.37,8892.61 ; LCD.3@13266.88,8890.31 LCD.4@13266.88,8990.31
  other v1: 13111.49,6511.41
USART1_RX: U1.43 U44.1 | length 1262.7
  Component Side w10: U1.43@13737.82,6418.24 13737.82,6159.37 13806.88,6090.31 14321.88,6090.31 14541.88,6310.31 U44.1@14621.88,6310.31
USART1_TX: U1.42 U44.4 | length 1257
  Component Side w10: U1.42@13718.14,6418.24 13718.14,6139.06 13796.88,6060.31 14336.88,6060.31 14436.88,6160.31 U44.4@14621.88,6160.31
USART2_RX: U1.17 U45.1 | length 2545.9
  Component Side w10: v1@12943.06,6863.92 13344.23,6863.92 13423.77,6784.38 U1.17@13470.11,6784.38 ; v1@13710.87,5815.31 U45.1@13986.88,5815.31
  Solder Side w10: v1@12943.74,6863.7 12943.74,5981.84 13110.85,5814.73 ; 13112.12,5815.06 v1@13703.87,5815.06
  other v1: 13705.53,5814.43 12943.06,6862.53
USART2_TX: U1.16 U45.4 | length 2812.1
  Component Side w10: v1@12898.42,6911.01 13352.49,6911.01 13408.25,6855.25 U1.16@13540.97,6855.25 ; v1@13701.63,5664.13 U45.4@13986.88,5664.13
  Solder Side w10: v1(12899.83,6912.23) 12899.83,5972.48 13209.47,5662.84 v1@13692.98,5662.84
  other v1: 13698.23,5662.68
USB_DM: R43.2 U1.44 | length 3171.6
  Component Side w10: U1.44@13757.51,6418.24 13757.51,6179.69 13816.88,6120.31 14311.88,6120.31 14686.51,6494.94 14686.51,8189.94 14730.28,8233.71 R43.2@14797.67,8233.71
USB_DP: R41.2 R42.2 U1.45 | length 3241.1
  Component Side w10: U1.45@13777.19,6418.24 13777.19,6205 13831.88,6150.31 14296.88,6150.31 14656.62,6510.05 14656.62,8244.01 14727.9,8315.29 ; 14726.88,8315.31 R41.2@14796.88,8315.31 ; R41.2@14797.69,8317.87 R42.2@14797.69,8389.88
pads on no net: DL.1 J1.1 J1.4 J1.6 J1.7 J1.8 J1.9 J1.10 J1.11 K1.2 K1.7 K2.2 K2.7 K3.2 K3.7 K4.2 K4.7 K5.2 K5.7 K6.2 K6.7 K7.2 K7.7 K8.2 K8.7 K9.2 K9.7 K10.2 K10.7 K11.3 K11.6 K12.4 K13.1 K13.4 K14.1 K14.4 K15.3 LCD.6 U1.3 U1.4 U1.7 U12.1 U12.3 U12.5 U12.7 U12.8 U14.2 U14.6 U14.8 USB.1
copper on no net:
  other v4: 7272.76,11555.01 7272.76,11745.95
  other v5: 7167.25,11507.76 7167.25,11793.2

## Polygon pours and split planes (outlines as drawn)
AGND on Component Side "T_AGND" (solid, remove dead copper, pour order 40): 7128.82,12257.77 7129.39,12258.33 15749.82,12258.33 15749.82,9674.88 15750.25,9674.45 15749.83,9674.04 12819.22,9674.04 12818.88,9674.04 12802.1,9657.26 12332.41,9187.57 12332.41,9169.31 12332.41,4861.05 12332.35,4860.99 12332.22,4860.87 7128.43,4860.87
DGND on Component Side "T_DGND" (solid, remove dead copper, pour order 38): 15750.23,9643.76 15749.8,9644.19 12831.24,9644.19 12831.23,9644.19 12362.6,9175.56 12362.61,9175.55 12362.61,4861.08 15749.62,4861.08 15750.09,4861.55
DGND on Solder Side "S_DGND" (solid, remove dead copper, pour order 44): 15749.92,9643.93 12831.43,9643.93 12831.18,9644.19 12362.62,9175.64 12362.6,9175.64 12362.6,4861.14 12362.64,4861.11 12362.78,4861.25 15750.08,4861.25
AGND on Solder Side "S_AGND" (solid, remove dead copper, pour order 42): 7128.66,12257.98 15769.54,12257.98 15769.58,12258.02 15750.04,12238.48 15750.04,9674.2 12819.05,9674.2 12818.97,9674.28 12332.58,9187.9 12332.58,9187.54 12332.58,4860.87 12332.61,4860.84 12332.44,4861.01 7128.52,4861.01
DGND on Ground Plane (split plane): 15749.96,4947.73 15663.31,4861.08 12362.7,4861.08 12362.7,9175.54 12831.17,9644.02 15749.96,9644.02
AGND on Ground Plane (split plane): 15749.96,12171.24 15749.96,9674.16 12822.63,9674.16 12819.69,9673.87 12816.86,9673.02 12814.25,9671.62 12811.97,9669.75 12810.09,9667.46 12808.7,9664.86 12808.41,9663.88 12342.84,9198.31 12341.86,9198.02 12339.25,9196.62 12336.97,9194.75 12335.09,9192.46 12333.7,9189.86 12332.84,9187.03 12332.55,9184.09 12332.55,4861.08 7128.74,4861.08 7128.74,12257.89 15663.31,12257.89
D3V3 on Power Plane (split plane): 15749.96,4947.73 15663.31,4861.08 12357.7,4861.08 12357.7,9168.4 12358.41,9168.98 12828.45,9639.02 15749.96,9639.02
AGND on Power Plane (split plane): 15749.96,12171.24 15749.96,9669.16 12826.55,9669.16 12825.69,9669.42 12822.75,9669.71 12819.81,9669.42 12818.96,9669.16 12817.63,9669.16 12814.69,9668.87 12811.86,9668.02 12809.25,9666.62 12806.97,9664.75 12805.09,9662.46 12803.7,9659.86 12802.84,9657.03 12802.74,9655.94 12340.78,9193.98 12339.69,9193.87 12336.86,9193.02 12334.25,9191.62 12331.97,9189.75 12330.09,9187.46 12328.7,9184.86 12327.84,9182.03 12327.55,9179.09 12327.55,4861.08 7128.74,4861.08 7128.74,12257.89 15663.31,12257.89

## Keep-outs
Keep-Out Layer:
  circle w10: c15662.11,12059.17 r53.15
  circle w10: c7249.91,12059.17 r53.15
  circle w10: c7249.91,5059.17 r53.15
  circle w10: c15662.11,5059.17 r53.15
  lines w10: 7108.64,4840.98 15671.64,4840.98 15770.06,4939.41 15770.06,12179.56 15671.64,12277.99 7108.64,12277.99 ; 7109.36,4840.67 7109.36,12277.67 15672.35,12277.67 15770.77,12179.25 15770.77,4939.09 15672.35,4840.67 7109.36,4840.67

## Other copper
Component Side:
  rectangle net DGND: 13231.88,8660.31 13471.88,8820.31
  rectangle net DGND: 13749.93,8724.48 13812.45,8734.68
  rectangle net D3V3: 13936.88,8795.31 14131.88,8960.31
  rectangle net DGND: 13749.93,8734.68 13812.45,8781.97
  pour cut-out: 7109.26,5210.29 7109.26,4840.74 7399.26,4840.74 7399.26,5210.29
  pour cut-out: 7108.13,12278.06 7108.13,11908.51 7398.13,11908.51 7398.13,12278.06
  pour cut-out: 15481.13,12278.36 15481.13,11908.82 15771.13,11908.82 15771.13,12278.36
  pour cut-out: 15478.67,5210.53 15478.67,4840.98 15768.67,4840.98 15768.67,5210.53
Ground Plane (plane layer: these items are gaps in the copper):
  lines w30: 12347.63,4839.33 12347.63,9184.09 ; 12349.72,9183.88 12824.72,9658.88 ; 12822.63,9659.09 15774.48,9659.09
Power Plane (plane layer: these items are gaps in the copper):
  lines w30: 12342.63,4847.86 12342.63,9179.09 ; 12347.75,9179.64 12822.75,9654.64 ; 12817.63,9654.09 15765.07,9654.09

## Silkscreen, mask and mechanical layers (free items; w line width, h text height)
Top Overlay:
  drawing of 4875 lines, arcs and shapes, not listed
  text "+" at 7243.14,11112.33 h30
  text "+" at 7247.04,10789.98 h30
  text "SMU_V2.01_05232018" at 13967.4,10274.53 h100
  text "+" at 13148.92,9372.62 h30
  text "-" at 13149.8,8667.44 h30
Mechanical 1:
  circle w10: c15662.11,12059.17 r53.15
  circle w10: c7249.91,12059.17 r53.15
  circle w10: c7249.91,5059.17 r53.15
  circle w10: c15662.11,5059.17 r53.15
  lines w10: 7109.36,4840.67 15672.35,4840.67 15770.77,4939.09 15770.77,12179.25 15672.35,12277.67 7109.36,12277.67 7109.36,4840.67

## Dimensions
7102.28,4635.66 to 15764.65,4593.54 on Top Overlay
15908.52,4838.09 to 16089.02,12280.74 on Top Overlay

## Text inside footprints (layer, text, board x,y; h text height)
J1: Top Overlay "6" at 15573.01,6375.53 h30 r270; Top Overlay "9" at 15573.01,6048.36 h30 r270; Top Overlay "5" at 15202.93,5993.83 h30 r270; Top Overlay "1" at 15202.93,6420.21 h30 r270
PWR_5V: Top Overlay "+" at 12846.82,11844.73 h30 r90; Top Overlay "-" at 12332.82,11924.73 h30 r270
PWR_24V: Top Overlay "-" at 9481.57,11928.03 h80 r270; Top Overlay "+" at 9963.24,11881.3 h80 r90